# Altium PCB machkhoasodientu.PcbDoc
Units mm, origin at the board's own origin, x right, y up, seen from the top; angles counter-clockwise.
Board outline 113 x 52 mm, 2 copper layers (Top Layer, Bottom Layer); 30 components, 29 nets, 106 pads, 0 vias.
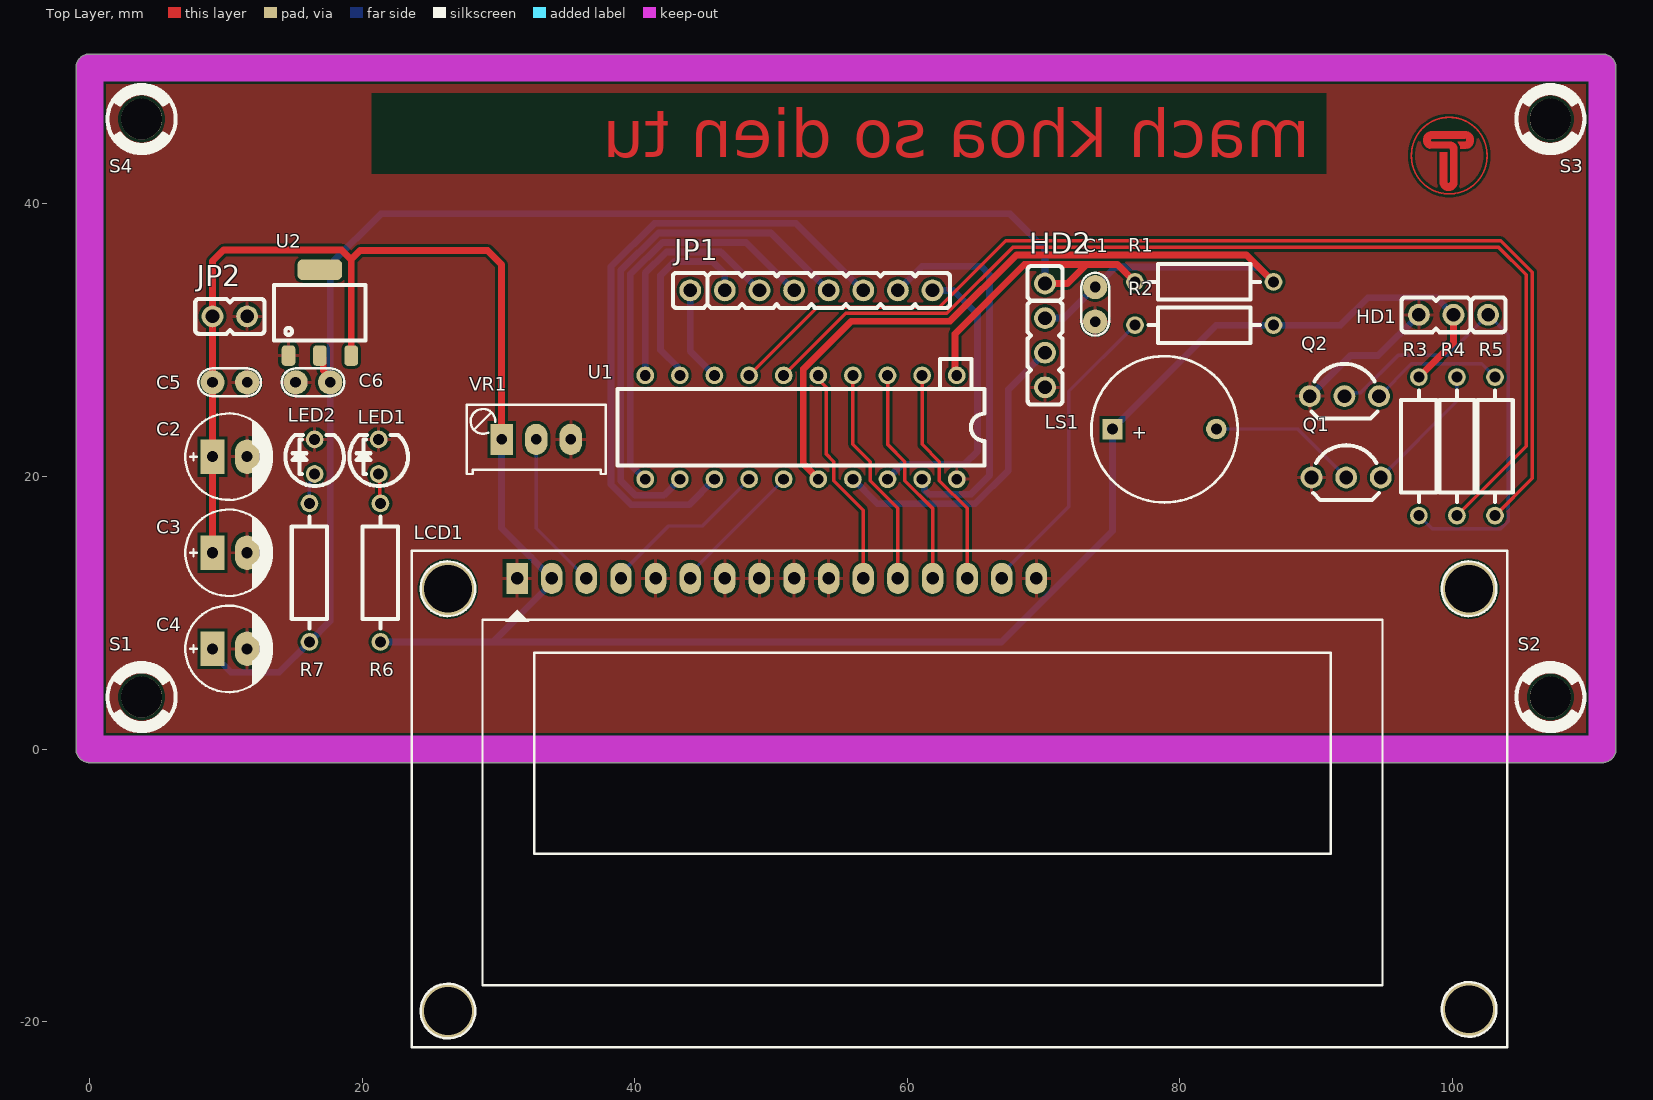
[diagram p0: Top Layer view]
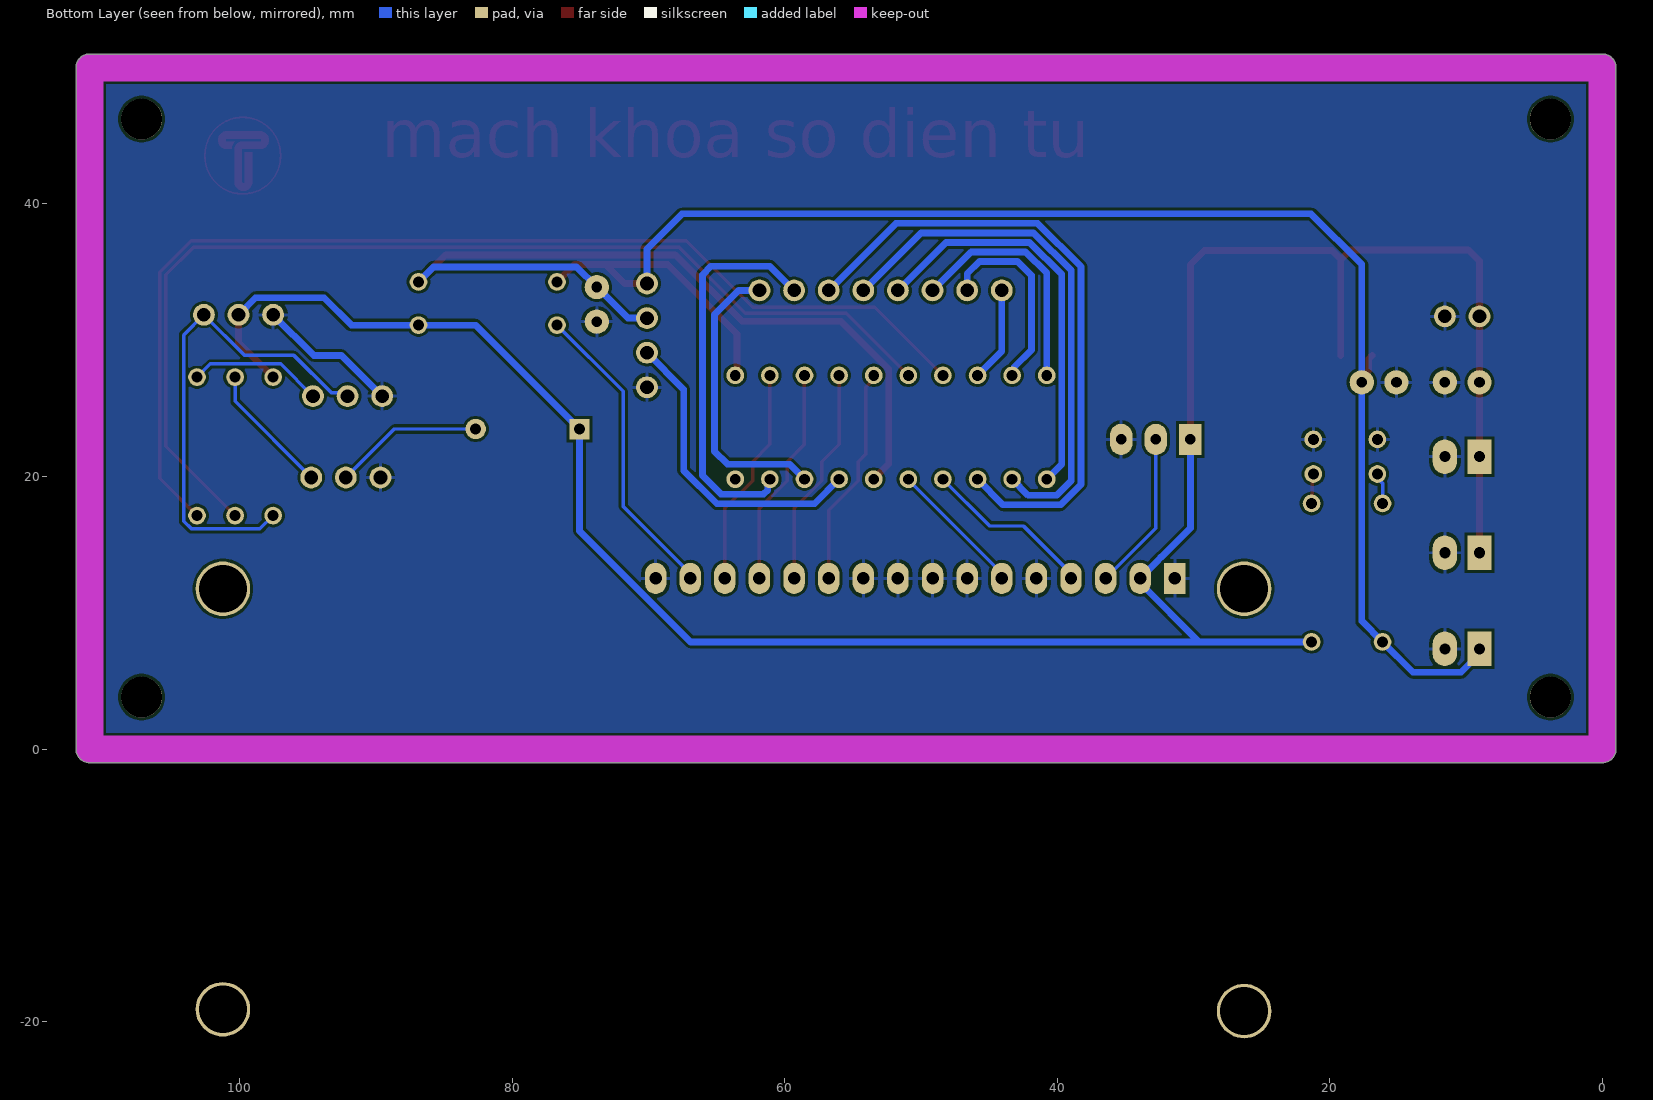
[diagram p1: Bottom Layer view, seen from below]
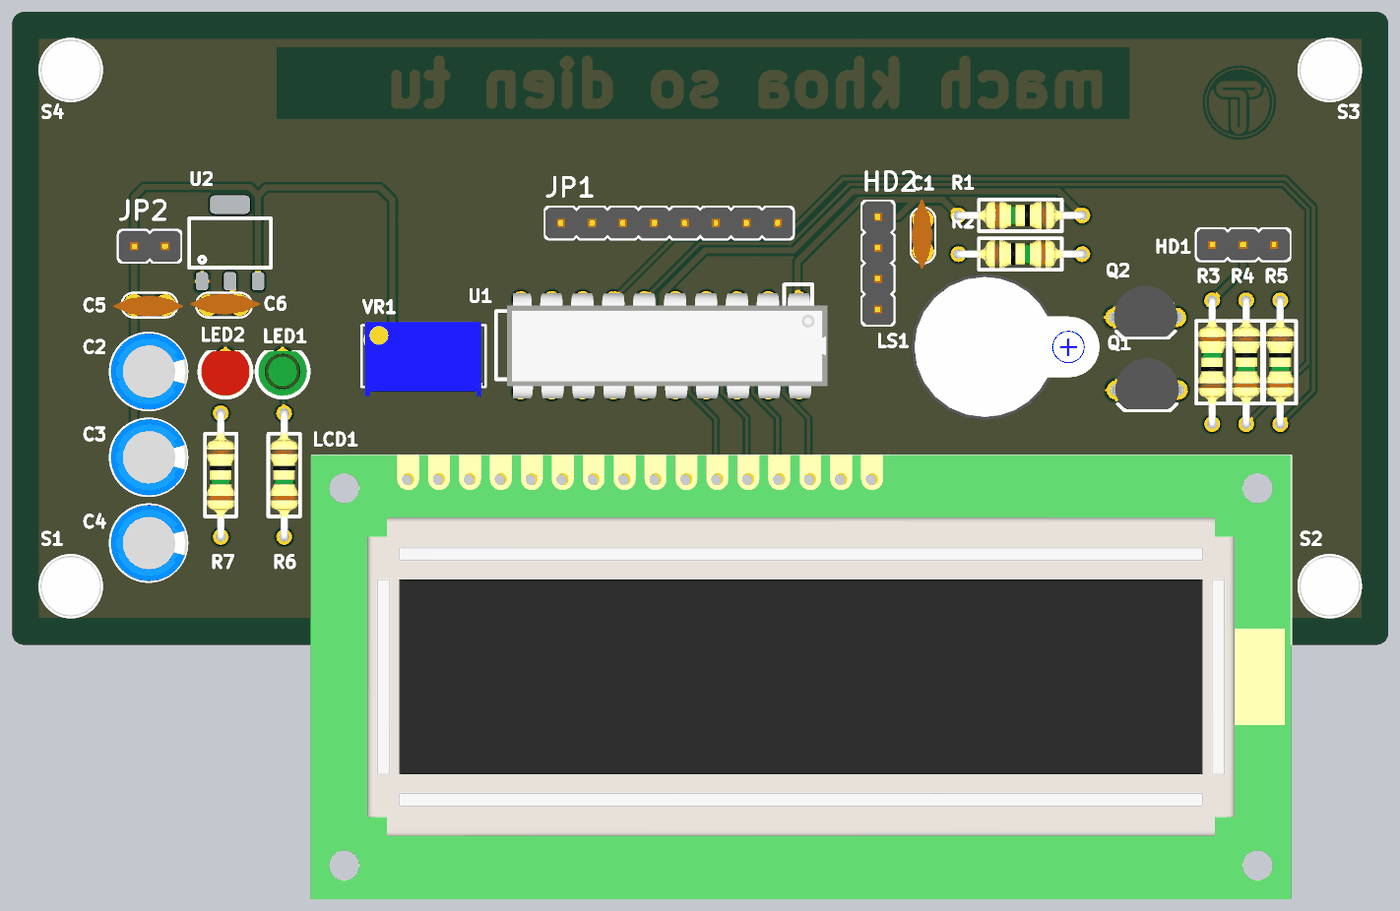
[diagram p2: 3D render of the assembled board from above, using the file's embedded part models]

## Layer stack, top to bottom
Top Solder: solder mask 0.0102, Solder Resist, Dk 3.5
Top Layer: signal copper 0.0356
Dielectric 1: dielectric 0.32, FR-4, Dk 4.8
Bottom Layer: signal copper 0.0356
Bottom Solder: solder mask 0.0102, Solder Resist, Dk 3.5

## Board outline
-1,0 -1,50 cw(c0,50) 0,51 111,51 cw(c111,50) 112,50 112,0 cw(c111,0) 111,-1 0,-1 cw(c0,0)

## Design rules (kind name [scope] priority, off if disabled: settings)
Clearance [All] p1: gap=0.2 ignorepadtopadclearanceinfootprint=FALSE
PolygonConnect [All] p1: connectstyle=Relief reliefconductorwidth=0.254 reliefentries=4 polygonreliefangle="90 Angle" airgapwidth=0.254
RoutingVias RoutingVias_power [InNetClass('power_class')] p1: holewidth=0.7 width=1.1 viastyle="Through Hole" minholewidth=0.7 minwidth=1.1 maxholewidth=0.7 maxwidth=1.1
RoutingVias RoutingVias_signal [InNetClass('power_class')] p2: holewidth=0.4 width=0.7 viastyle="Through Hole" minholewidth=0.4 minwidth=0.7 maxholewidth=0.4 maxwidth=0.7
SolderMaskExpansion [All] p1: expansion=0.102 istentingtop=FALSE
Width Width_power [InNetClass('power_class')] p1: maxlimit=2 minlimit=0.5 preferedwidth=1
Width Width_signal [InNetClass('power_class')] p2: maxlimit=0.2 minlimit=0.2 preferedwidth=0.2
30 further rules are at their usual default settings.

## Components (designator, comment, footprint, x,y, rotation, side; value= is the part's Value field where it differs from the comment)
C1 "1nF" CN1 73.787,31.358 r90 top value=100pF
C2 "100uF" CP1/2.5 9.017,21.452 r0 top value="47uF/16 - 50V"
C3 "100uF" CP1/2.5 9.017,14.403 r0 top value="47uF/16 - 50V"
C4 "100uF" CP1/2.5 9.017,7.355 r0 top value="47uF/16 - 50V"
C5 "1nF" CN1 11.557,26.913 r180 top value=100pF
C6 "1nF" CN1 15.113,26.913 r0 top value=100pF
HD1 "Header 3" Header_3 100.076,31.866 r180 top
HD2 "Header 4" Header_4 70.104,30.353 r270 top
JP1 "HD8" Header_8 52.959,33.655 r0 top
JP2 "Header 2" Header_2 10.287,31.75 r180 top
LCD1 "LCD 16x2A" LCD16x2 31.369,12.524 r0 top value=LCD16x2A
LED1 "LED_G_3" LED3G 21.209,20.182 r90 top value=Green
LED2 "LED_R_3" LED3R 16.51,20.182 r90 top value=Red
LS1 "Speaker" SPEAKER 75.057,23.471 r0 top
Q1 "2SC1815" 2SC1815 92.202,19.928 r0 top
Q2 "2SC1815" 2SC1815 92.075,25.897 r0 top
R1 "Res2" "RES 1/4W CFR25" 86.868,34.279 r180 top value=47K
R2 "Res2" "RES 1/4W CFR25" 76.708,31.104 r0 top value=47K
R3 "Res2" "RES 1/4W CFR25" 97.536,17.134 r90 top value=47K
R4 "Res2" "RES 1/4W CFR25" 100.33,27.294 r270 top value=47K
R5 "Res2" "RES 1/4W CFR25" 103.124,27.294 r270 top value=47K
R6 "Res2" "RES 1/4W CFR25" 21.336,18.023 r270 top value=47K
R7 "Res2" "RES 1/4W CFR25" 16.129,18.023 r270 top value=47K
S1 "Screw" "Screw 3 small" 3.81,3.81 r0 top
S2 "Screw" "Screw 3 small" 107.188,3.81 r0 top
S3 "Screw" "Screw 3 small" 107.188,46.228 r0 top
S4 "Screw" "Screw 3 small" 3.81,46.228 r0 top
U1 "MSP430G2553IN20" MSP430G2553 63.627,27.421 r180 top
U2 "AMS1117-3V3" AMS1117-3.3V 16.891,32.018 r90 top
VR1 "10K" VR1 30.226,22.722 r0 top value="VR 10K"

## Footprints (in the part's own frame and the unit in brackets; to place one, negate y for a bottom-side part, rotate by r counter-clockwise, add the part's x,y. Pads: shape width x height; smd on the part's side, far side on the other; paste and mask are expansions set on the pad)
2SC1815 [mm] "TO-92 Body Dia. 4.5mm; Leads 0.51 x 0.48 mm (max)"
  round 1.6 hole 1 mask+0.1: 1(-2.54,0) 2(0,0)
  round 1.6 hole 1: 3(2.54,0)
  silkscreen extent -2.41,-1.65 2.41,2.37, body extent -2.79,-1.59 2.79,2.61, height 10
AMS1117-3.3V [mm] "SOT223, 4-Leads, Body 6.7x7.3mm (max), Pitch 2.30mm, IPC Medium Density"
  rrect50% 1.5x1 smd: 1(-3.15,2.3) 2(-3.15,0) 3(-3.15,-2.3)
  rrect50% 1.5x3.28 smd: 4(3.15,0)
  silkscreen extent -2.03,-3.35 2.03,3.35
CN1 [mil]
  round 70 hole 31: 1(0,0) 2(100,0)
  silkscreen extent -40,-40 141,40, body extent -60,-30 170,37, height 265
CP1/2.5 [mil] "Tu hoa 33 >100 uF,50V, 220uF/16V,25V"
  rect 70x100 hole 32: 1(0,0)
  oval 70x100 hole 32: 2(100,0)
  silkscreen extent -78,-125 172,125, body extent -76,-124 172,124, height 422
Header_2 [mm] "Connector DIP, 2Pin_2.54mm"
  round 1.6 hole 1 mask+0.1: 1(-1.27,0) 2(1.27,0)
  silkscreen extent -2.54,-1.28 2.54,1.28, body extent -2.54,-1.27 2.54,1.27, height 10.1
Header_3 [mm] "Connector DIP, 3Pin_2.54mm"
  round 1.6 hole 1 mask+0.1: 1(-2.54,0) 2(0,0) 3(2.54,0)
  silkscreen extent -3.81,-1.28 3.81,1.28, body extent -3.81,-1.27 3.81,1.27, height 10.1
Header_4 [mm] "Connector DIP, 4Pin_2.54mm"
  round 1.6 hole 1 mask+0.1: 1(-3.81,0) 2(-1.27,0) 3(1.27,0) 4(3.81,0)
  silkscreen extent -5.08,-1.28 5.08,1.28, body extent -5.08,-1.27 5.08,1.27, height 10.1
Header_8 [mm] "Connector DIP Male, 8Pin_2.54mm"
  round 1.6 hole 1 mask+0.1: 1(-8.89,0) 2(-6.35,0) 3(-3.81,0) 4(-1.27,0) 5(1.27,0) 6(3.81,0) 7(6.35,0) 8(8.89,0)
  silkscreen extent -10.16,-1.28 10.16,1.28, body extent -10.16,-1.27 10.16,1.27, height 10.1
LCD16x2 [mil] "LCD dipslay 16x2, 16 pin"
  rect 62x90 hole 36: 1(0,0)
  oval 62x90 hole 36: 2(100,0) 3(200,0) 4(300,0) 5(400,0) 6(500,0) 7(600,0) 8(700,0) 9(800,0) 10(900,0) 11(1000,0) 12(1100,0) 13(1200,0) 14(1300,0) 15(1400,0) 16(1500,0)
  round 157.48 hole 137.8: "Hole 0"(-200,-1250) "Hole 0"(-200,-30) "Hole 0"(2750,-1245) "Hole 0"(2750,-30)
  silkscreen extent -305,-1355 2860,80, body extent -309,-1355 2860,82, height 414
LED3G [mm] "LED 3mm_GREEN"
  round 1.3 hole 0.8: 1(0,0) 2(2.54,0)
  silkscreen extent -0.88,-2.15 2.87,2.15, body extent -0.73,-2 2.94,2, height 4.6
LED3R [mm] "LED 3mm_RED"
  round 1.3 hole 0.8: 1(0,0) 2(2.54,0)
  silkscreen extent -0.88,-2.15 2.87,2.15, body extent -0.73,-2 2.94,2, height 4.6
MSP430G2553 [mm] "DIP 20, 20 PIN, W 300mil, Pin to pin 100mil"
  round 1.3 hole 0.8: 1(0,0) 2(2.54,0) 3(5.08,0) 4(7.62,0) 5(10.16,0) 6(12.7,0) 7(15.24,0) 8(17.78,0) 9(20.32,0) 10(22.86,0) 11(22.86,7.62) 12(20.32,7.62) 13(17.78,7.62) 14(15.24,7.62) 15(12.7,7.62) 16(10.16,7.62) 17(7.62,7.62) 18(5.08,7.62) 19(2.54,7.62) 20(0,7.62)
  silkscreen extent -2.03,-1.19 24.89,6.61, body extent -2.31,-0.46 24,8.18, height 3.94
"RES 1/4W CFR25" [mm] "Axial Device, Thru-Hole; 2 Leads fi 0.55"
  round 1.3 hole 0.8 mask+0.1: 1(0,0) 2(10.16,0)
  silkscreen extent 0.98,-1.3 9.18,1.3, body extent -0.3,-1.16 10.47,1.16, height 2.93
"Screw 3 small" [mm] "Hole 3mm, outline 5mm"
  round 3 hole 3 mask+0.1: 1(0,0)
  silkscreen extent -2.5,-2.5 2.5,2.5, body extent -2.5,-2.5 2.5,2.5, height 1.73
SPEAKER [mm]
  rect 1.5x1.5 hole 0.8: 1(0,0)
  round 1.5 hole 0.8: 2(7.62,0.013)
  silkscreen extent -1.55,-5.38 9.18,5.36, body extent -2.22,-6 13.24,6, height 4.5
VR1 [mil] "Variable Resistor"
  rect 65x90 hole 30: 1(0,0)
  oval 65x90 hole 30: 2(100,0) 3(200,0)
  silkscreen extent -100,-100 301,100, body extent -88,-130 288,110, height 455

## Part data
C1 C5 C6: library part CN1, "Cap np  1pF - 472pF"
C2 C3 C4: library part CP2, "C 47uF/50V , 220uF/16V", Description 1="470uF/6,3V - 330uF/10V - 220uF/16V", Description 2="100uF/25V - 35V - 47uF/50V - 22uF/100V", Description 3="33uF => 47uF/63V - 1uF => 4,7uF/160V", Description 4="1uF => 2,2uF/250V - 1uF/350V"
HD1: library part Header3
HD2: library part Header4
JP1: library part Header8, "Header 8", Creat by=VanDungEvn@Gmail.com
JP2: library part Header2
LCD1: library part LCD16x2A, "LCD dipslay 16 char, 2 line"
LED1: library part LED_GREEN_3MM, "LED Green 3mm", ComponentLink1Description=Datasheet, ComponentLink1URL="D:\Dropbox\Datasheets\Opto and Illumination\LEDs\SMD LED.pdf", Unit Price=0.0476
LED2: library part LED_RED_3MM, "LED Red 3mm", ComponentLink1Description=Datasheet, ComponentLink1URL="D:\Dropbox\Datasheets\Opto and Illumination\LEDs\SMD LED.pdf", Unit Price=0.0476
LS1: "Loudspeaker", LatestRevisionDate=17-Jul-2002, LatestRevisionNote="Re-released for DXP Platform.", PackageReference=PIN2, Published=24-Mar-1999, Publisher="Altium Limited"
Q1 Q2: "Trans NPN 50V 150mA TO-92", ComponentLink1Description=Datasheet, ComponentLink1URL="D:\Dropbox\Datasheets\Transistors\P Channel Bipolar\2SC1815.pdf", Unit Price=0.0143
R1 R2 R3 R4 R5 R6 R7: "Resistor", LatestRevisionDate=17-Jul-2002, LatestRevisionNote="Re-released for DXP Platform.", PackageDescription="Axial Device, Thru-Hole; 2 Leads; 0.4 in Pin Spacing", PackageReference=AXIAL-0.4, Published=8-Jun-2000, Publisher="Altium Limited"
U1: "MCU 16bit 16KB 1.8-3.6V 16MHz DIP20", ComponentLink1Description=Datasheet, ComponentLink1URL="D:\Dropbox\Datasheets\Microcontrolers\MSP430\MSP430x2xx Family\MSP430G2553.pdf", Unit Price=1.0000
U2: "Linear Voltage Regulator 3.3V 1A 15V Max SOT-223", ComponentLink1Description=Datasheet, ComponentLink1URL="D:\Dropbox\Datasheets\Power Management ICs\Linear Regulators\AMS1117.pdf", Unit Price=0.2000
VR1: library part VR2, "Var Resistor"

## Nets (pads, with @x,y where several pads share a name; then routed paths per layer and width w, separated by ;. In a path a pad name is that pad's centre, name@x,y a point inside that pad or via, vN(x,y) a via of type N, cw(c..) or ccw(c..) an arc to the next point about the centre after c; other vN are vias at no path point)
3V3: C4.1 C6.2 HD2.1 R1.2 R7.2 U1.1 U2.2 | length 119.7
  Top Layer w0.5: U2.2 17.141,28.618 17.141,27.771 17.653,27.259 C6.2 ; U1.1 63.488,27.56 63.488,30.468 68.58,35.56 73.152,35.56 ; HD2.1 71.755,34.163 73.152,35.56 ; R1.2 75.427,35.56 73.152,35.56
  Bottom Layer w0.5: C4.1 9.017,6.974 10.356,5.635 13.901,5.635 R7.2 17.653,9.387 C6.2 17.653,35.56 21.37,39.277 67.53,39.277 70.104,36.703 HD2.1@70.104,34.199
+5: C2.1 C3.1 C5.2 HD1.2 JP2.2 LCD1.2 LS1.1 R2.2 R3.2 R6.2 U2.3 VR1.1 | length 181.7
  Top Layer w0.5: C3.1 C2.1 C5.2 JP2.2 9.017,35.814 9.826,36.623 18.495,36.623 19.191,35.927 ; U2.3 19.191,35.927 ; VR1.1 30.226,35.56 29.21,36.576 19.84,36.576 19.191,35.927 ; R3.2 100.076,29.834 HD1.2
  Bottom Layer w0.5: R6.2 29.604,7.863 ; VR1.1 30.226,16.207 32.316,14.117 32.343,14.117 32.606,13.853 32.606,13.826 LCD1.2 33.909,12.168 29.604,7.863 ; HD1.2 98.826,33.116 93.812,33.116 91.8,31.104 R2.2 82.69,31.104 LS1.1 75.057,16.006 66.914,7.863 29.604,7.863
DATA4: LCD1.11 U1.5 | length 16.3
  Top Layer w0.254: U1.5 53.467,27.138 54.044,26.561 54.044,21.648 54.61,21.082 54.61,19.685 56.769,17.526 LCD1.11
DATA5: LCD1.12 U1.4 | length 16.3
  Top Layer w0.254: U1.4 56.007,22.352 57.277,21.082 57.277,19.689 59.309,17.657 LCD1.12
DATA6: LCD1.13 U1.3 | length 16.3
  Top Layer w0.254: U1.3 58.547,22.352 59.817,21.082 59.817,19.689 61.849,17.657 LCD1.13
DATA7: LCD1.14 U1.2 | length 16.3
  Top Layer w0.254: U1.2 61.087,22.352 62.357,21.082 62.357,19.689 64.389,17.657 LCD1.14
GND: C1.1 C2.2 C3.2 C4.2 C5.1 C6.1 HD1.3 HD2.4 JP2.1 LCD1.1 LCD1.5 LCD1.7 LCD1.8 LCD1.9 LCD1.10 LCD1.16 LED1.2 LED2.2 Q1.1 Q2.1 U1.20 U2.1 VR1.3 | length 10.5
  Bottom Layer w0.5: Q2.1 92.519,28.881 94.551,28.881 HD1.3
KEY1: JP1.1 U1.8 | length 7
  Bottom Layer w0.5: JP1.1 44.069,29.199 U1.8
KEY2: JP1.2 U1.9 | length 14.6
  Bottom Layer w0.5: U1.9 43.154,27.574 43.154,28.023 41.899,29.278 41.899,34.761 42.915,35.777 45.709,35.777 46.609,34.877 JP1.2
KEY3: JP1.3 U1.10 | length 17.7
  Bottom Layer w0.5: U1.10 40.767,34.925 42.319,36.477 46.316,36.477 JP1.3@49.143,33.649
KEY4: JP1.4 U1.11 | length 29.9
  Bottom Layer w0.5: U1.11 39.667,20.901 39.667,34.815 42.029,37.177 48.156,37.177 JP1.4@51.683,33.649
KEY5: JP1.5 U1.12 | length 38.8
  Bottom Layer w0.5: U1.12 42.128,18.622 40.052,18.622 38.967,19.707 38.967,35.105 41.739,37.877 49.996,37.877 JP1.5@54.223,33.649
KEY6: JP1.6 U1.13 | length 46.8
  Bottom Layer w0.5: U1.13 43.968,17.922 39.762,17.922 38.267,19.417 38.267,35.395 41.449,38.577 51.836,38.577 JP1.6@56.763,33.649
KEY7: JP1.7 U1.19 | length 28.8
  Bottom Layer w0.5: JP1.7@59.315,33.649 61.098,35.433 65.405,35.433 66.04,34.798 66.04,20.066 64.675,18.701 61.553,18.701 61.24,19.014 61.24,19.648 U1.19
KEY8: JP1.8 U1.18 | length 21.5
  Bottom Layer w0.5: U1.18 59.647,20.901 64.208,20.901 65.151,21.844 65.151,31.877 63.384,33.644 JP1.8@61.849,33.644
LCD_EN: LCD1.6 U1.15 | length 10.1
  Bottom Layer w0.254: LCD1.6 44.069,12.911 50.927,19.769 U1.15
LCD_RS: LCD1.4 U1.14 | length 12.6
  Bottom Layer w0.254: LCD1.4 38.989,12.879 42.476,16.366 44.953,16.366 U1.14
MOTOR: R5.2 U1.7 | length 81.5
  Top Layer w0.254: U1.7 53.394,32.428 62.353,32.428 67.216,37.291 103.552,37.291 105.864,34.979 105.864,19.874 R5.2
NetHD1_1: HD1.1 Q2.2 R3.1 | length 36
  Bottom Layer w0.254: Q2.2 92.31,26.132 93.256,26.132 96.006,28.881 99.632,28.881 HD1.1 104.101,30.381 104.101,16.729 103.529,16.157 98.513,16.157 R3.1
NetLCD1_3: LCD1.3 VR1.2 | length 11.7
  Bottom Layer w0.254: VR1.2 32.766,16.207 LCD1.3
NetLCD1_15: LCD1.15 R2.1 | length 22.6
  Bottom Layer w0.254: LCD1.15 66.929,12.879 71.845,17.795 71.845,26.241 R2.1
NetLED1_1: LED1.1 R6.1 | length 2.2
  Top Layer w0.254: LED1.1 21.272,20.118 21.272,18.086 R6.1
NetLED2_1: LED2.1 R7.1 | length 2.3
  Bottom Layer w0.254: R7.1 16.129,19.518 16.51,19.899 LED2.1
NetLS1_2: LS1.2 Q1.2 | length 11
  Bottom Layer w0.254: LS1.2 88.646,23.484 Q1.2
NetQ1_3: Q1.3 R4.1 | length 9.7
  Bottom Layer w0.254: Q1.3 100.33,25.516 R4.1
NetQ2_3: Q2.3 R5.1 | length 9.9
  Bottom Layer w0.254: Q2.3 96.989,28.271 102.147,28.271 R5.1
RST: C1.2 HD2.2 R1.1 U1.16 | length 66.1
  Top Layer w0.5: U1.16 52.367,20.901 52.367,27.877 55.887,31.397 63.144,31.397 68.007,36.26 84.887,36.26 R1.1
  Bottom Layer w0.5: HD2.2 71.512,31.623 C1.2 75.268,35.379 85.768,35.379 R1.1
SPEAKER: R4.2 U1.6 | length 79
  Top Layer w0.254: U1.6 55.48,31.974 62.905,31.974 67.768,36.837 103.364,36.837 105.41,34.791 105.41,22.214 R4.2
TEST: HD2.3 U1.17 | length 22.9
  Bottom Layer w0.5: U1.17 57.807,18.001 64.965,18.001 67.412,20.448 67.412,26.391 HD2.3
pads on no net: "LCD1.Hole 0" S1.1 S2.1 S3.1 S4.1 U2.4

## Polygon pours and split planes (outlines as drawn)
GND on Top Layer "GND_L01_P000" (solid, pour order 0): 0,0 110.998,0 110.998,49.911 0,49.911
GND on Bottom Layer "GND_L02_P001" (solid, pour order 1): 110.998,49.911 110.998,0 0,0 0,49.911

## Keep-outs
Keep-Out Layer:
  lines w2: 0,0 0,50 111,50 111,0 0,0

## Other copper
Top Layer:
  region: 1391 vertices and 1 holes, not listed, extent 96.955,40.697 102.574,46.392
  region: 687 vertices and 0 holes, not listed, extent 97.863,40.964 101.571,45.331
  text "mach khoa so dien tu" at 89.551,43.418 h3.5

## Silkscreen, mask and mechanical layers (free items; w line width, h text height)
Drill Drawing:
  lines w0.254: -45.408,58.864 -43.714,58.864 -43.714,60.558 -45.408,60.558 -45.408,58.864 ; -45.408,63.098 -44.984,63.098 -44.984,62.674 -44.138,62.674 -44.138,63.098 -43.714,63.098 -43.714,63.944 -44.138,63.944 -44.138,64.368 -44.984,64.368 -44.984,63.944 -45.408,63.944 -45.408,63.098 ; -45.408,66.484 -44.561,66.908 -43.714,66.484 -44.138,67.331 -43.714,68.178 -44.561,67.754 -45.408,68.178 -44.984,67.331 -45.408,66.484 ; -45.408,71.141 -44.561,70.294 -43.714,71.141 -44.561,71.988 -45.408,71.141 ; -45.408,75.798 -43.714,75.798 -44.561,74.105 -45.408,75.798 ; -45.408,78.338 -44.984,78.338 -44.561,77.915 -44.138,78.338 -43.714,78.338 -44.138,78.761 -43.714,79.184 -44.138,79.184 -44.561,79.608 -44.984,79.184 -45.408,79.184 -44.984,78.761 -45.408,78.338 ; -45.408,81.724 -43.714,81.724 -43.714,83.418 -45.408,83.418 -45.408,81.724 ; -45.408,85.534 -45.408,85.958 -44.984,86.381 -45.408,86.804 -45.408,87.228 -44.984,87.228 -44.561,86.804 -44.138,87.228 -43.714,87.228 -43.714,86.804 -44.138,86.381 -43.714,85.958 -43.714,85.534 -44.138,85.534 -44.561,85.958 -44.984,85.534 -45.408,85.534 ; -45.069,82.063 -44.053,82.063 -44.053,83.079 -45.069,83.079 -45.069,82.063
  lines w0.381: -46.926,57.721 225.641,57.721 ; -46.926,88.201 225.641,88.201 ; -32.934,53.911 -32.934,92.011 ; -17.952,53.911 -17.952,92.011 ; 11.249,53.911 11.249,92.011 ; 24.098,53.911 24.098,92.011 ; 42.737,53.911 42.737,92.011 ; 80.826,53.911 80.826,92.011 ; 95.808,53.911 95.808,92.011 ; 114.751,53.911 114.751,92.011 ; 135.065,53.911 135.065,92.011 ; 156.751,53.911 156.751,92.011 ; 190.625,53.911 190.625,92.011 ; -46.926,53.911 225.641,53.911 225.641,92.011 -46.926,92.011 -46.926,53.911
  text "Symbol" at -44.64,89.344 h1.83
  text "Count" at -31.791,89.344 h1.83
  text "Hole Size" at -16.809,89.344 h1.83
  text "Plated" at 12.392,89.344 h1.83
  text "Hole Type" at 25.241,89.344 h1.83
  text "Drill Layer Pair" at 43.88,89.344 h1.83
  text "Via/Pad" at 81.969,89.344 h1.83
  text "Pad Shape" at 96.951,89.344 h1.83
  text "Template" at 115.894,89.344 h1.83
  text "Description" at 136.208,89.344 h1.83
  text "Hole Tolerance (+)" at 157.894,89.344 h1.83
  text "Hole Tolerance (-)" at 191.768,89.344 h1.83
  text "3" at -31.791,85.534 h1.52
  text "0.762mm (30.00mil)" at -16.809,85.534 h1.52
  text "PTH" at 12.392,85.534 h1.52
  text "Round" at 25.241,85.534 h1.52
  text "Top Layer - Bottom Layer" at 43.88,85.534 h1.52
  text "Pad" at 81.969,85.534 h1.52
  text "(Mixed)" at 96.951,85.534 h1.52
  text "(Mixed)" at 115.894,85.534 h1.52
  text "4" at -31.791,81.724 h1.52
  text "3.000mm (118.11mil)" at -16.809,81.724 h1.52
  text "PTH" at 12.392,81.724 h1.52
  text "Round" at 25.241,81.724 h1.52
  text "Top Layer - Bottom Layer" at 43.88,81.724 h1.52
  text "Pad" at 81.969,81.724 h1.52
  text "Rounded" at 96.951,81.724 h1.52
  text "c300h300m310" at 115.894,81.724 h1.52
  text "4" at -31.791,77.915 h1.52
  text "3.500mm (137.79mil)" at -16.809,77.915 h1.52
  text "PTH" at 12.392,77.915 h1.52
  text "Round" at 25.241,77.915 h1.52
  text "Top Layer - Bottom Layer" at 43.88,77.915 h1.52
  text "Pad" at 81.969,77.915 h1.52
  text "Rounded" at 96.951,77.915 h1.52
  text "c400h350" at 115.894,77.915 h1.52
  text "6" at -31.791,74.105 h1.52
  text "0.787mm (31.00mil)" at -16.809,74.105 h1.52
  text "PTH" at 12.392,74.105 h1.52
  text "Round" at 25.241,74.105 h1.52
  text "Top Layer - Bottom Layer" at 43.88,74.105 h1.52
  text "Pad" at 81.969,74.105 h1.52
  text "Rounded" at 96.951,74.105 h1.52
  text "c178h79" at 115.894,74.105 h1.52
  text "6" at -31.791,70.294 h1.52
  text "0.813mm (32.00mil)" at -16.809,70.294 h1.52
  text "PTH" at 12.392,70.294 h1.52
  text "Round" at 25.241,70.294 h1.52
  text "Top Layer - Bottom Layer" at 43.88,70.294 h1.52
  text "Pad" at 81.969,70.294 h1.52
  text "(Mixed)" at 96.951,70.294 h1.52
  text "(Mixed)" at 115.894,70.294 h1.52
  text "16" at -31.791,66.484 h1.52
  text "0.914mm (36.00mil)" at -16.809,66.484 h1.52
  text "PTH" at 12.392,66.484 h1.52
  text "Round" at 25.241,66.484 h1.52
  text "Top Layer - Bottom Layer" at 43.88,66.484 h1.52
  text "Pad" at 81.969,66.484 h1.52
  text "(Mixed)" at 96.951,66.484 h1.52
  text "(Mixed)" at 115.894,66.484 h1.52
  text "23" at -31.791,62.674 h1.52
  text "1.000mm (39.37mil)" at -16.809,62.674 h1.52
  text "PTH" at 12.392,62.674 h1.52
  text "Round" at 25.241,62.674 h1.52
  text "Top Layer - Bottom Layer" at 43.88,62.674 h1.52
  text "Pad" at 81.969,62.674 h1.52
  text "Rounded" at 96.951,62.674 h1.52
  text "(Mixed)" at 115.894,62.674 h1.52
  text "40" at -31.791,58.864 h1.52
  text "0.800mm (31.50mil)" at -16.809,58.864 h1.52
  text "PTH" at 12.392,58.864 h1.52
  text "Round" at 25.241,58.864 h1.52
  text "Top Layer - Bottom Layer" at 43.88,58.864 h1.52
  text "Pad" at 81.969,58.864 h1.52
  text "(Mixed)" at 96.951,58.864 h1.52
  text "(Mixed)" at 115.894,58.864 h1.52
  text "102 Total" at -31.791,55.054 h1.52

## Text inside footprints (layer, text, board x,y; h text height)
HD1: Mechanical 2 "3" at 97.79,32.12 h1 r180; Mechanical 2 "1" at 102.87,32.12 h1 r180
HD2: Mechanical 2 "1" at 69.85,34.417 h1.2 r270; Mechanical 2 "4" at 69.85,26.797 h1.2 r270
JP1: Mechanical 2 "1" at 43.859,33.255 h1.2; Mechanical 2 "8" at 61.559,33.255 h1.2
JP2: Mechanical 1 "HD?" at 10.237,31.7 h0.8 r180; Mechanical 1 "2" at 9.271,32.004 h1.2 r180; Mechanical 1 "1" at 11.811,32.004 h1.2 r180
LS1: Top Overlay "+" at 76.467,22.76 h1
Q1: Mechanical 1 "E" at 89.408,19.547 h1; Mechanical 1 "C" at 91.948,19.547 h1; Mechanical 1 "B" at 94.488,19.547 h1
Q2: Mechanical 1 "E" at 89.281,25.516 h1; Mechanical 1 "C" at 91.821,25.516 h1; Mechanical 1 "B" at 94.361,25.516 h1
R1: Mechanical 1 "R?" at 86.788,34.279 h1 r180
R2: Mechanical 1 "R?" at 76.788,31.104 h1
R3: Mechanical 1 "R?" at 97.536,17.214 h1 r90
R4: Mechanical 1 "R?" at 100.33,27.214 h1 r270
R5: Mechanical 1 "R?" at 103.124,27.214 h1 r270
R6: Mechanical 1 "R?" at 21.336,17.943 h1 r270
R7: Mechanical 1 "R?" at 16.129,17.943 h1 r270
U1: Mechanical 1 "1" at 63.897,26.111 h1 r180; Mechanical 1 "10" at 41.497,26.011 h1 r180; Mechanical 1 "11" at 41.497,22.311 h1 r180; Mechanical 1 "20" at 64.597,22.311 h1 r180
U2: Mechanical 1 "3" at 18.781,30.443 h1; Mechanical 1 "2" at 16.576,30.443 h1; Mechanical 1 "1" at 14.371,30.443 h1